# Altium PCB Mixer Placed.PCBDOC
Units mil, origin at the board's own origin, x right, y up, seen from the top; angles counter-clockwise.
Board outline 8000 x 4000 mil, 2 copper layers (Top Layer, Bottom Layer); 97 components, 56 nets, 281 pads, 0 vias.
Unrouted connection lines stored in the file: 188.
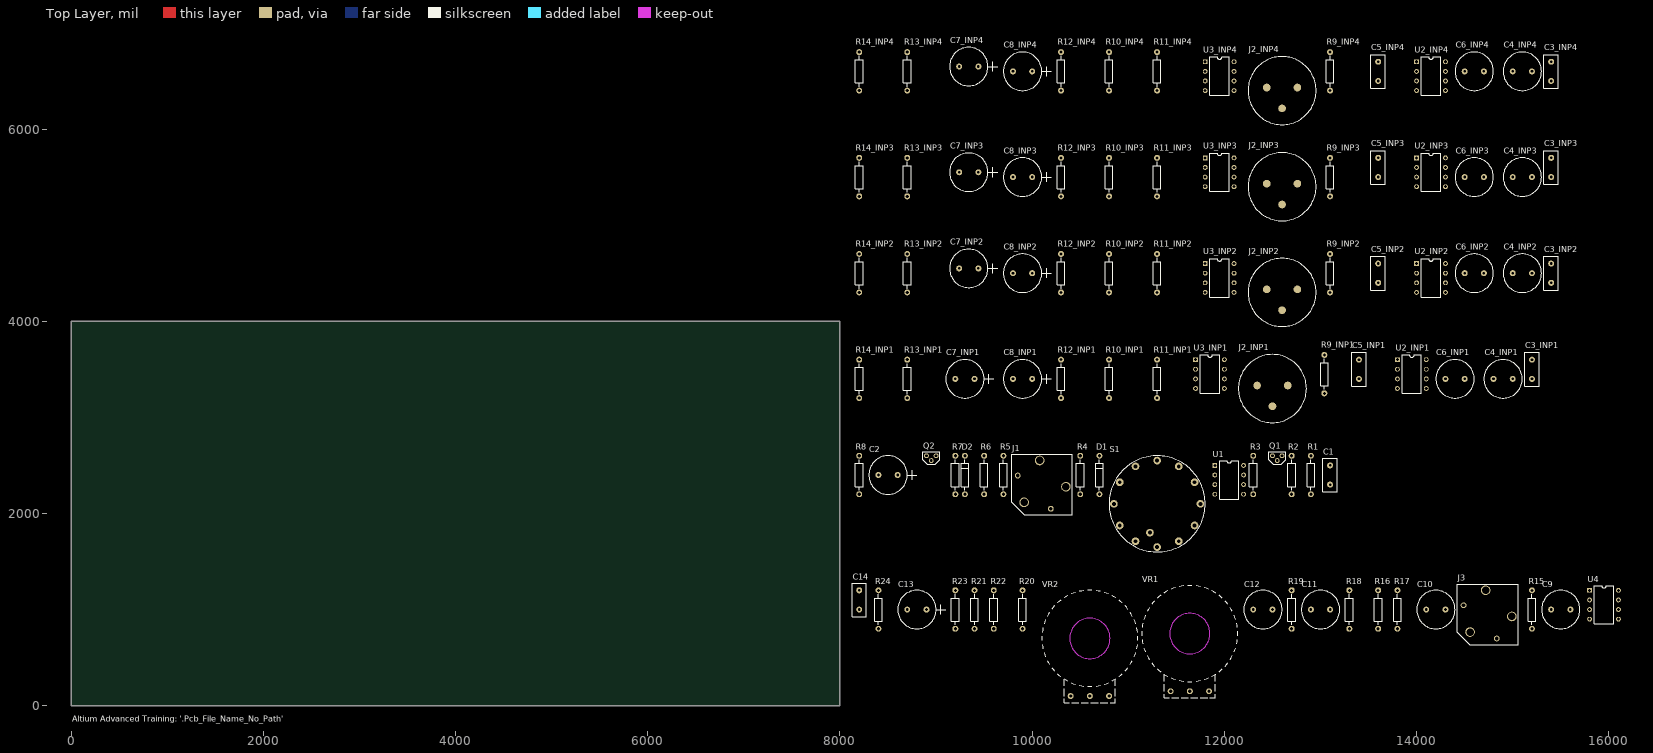
[diagram p0: Top Layer view]
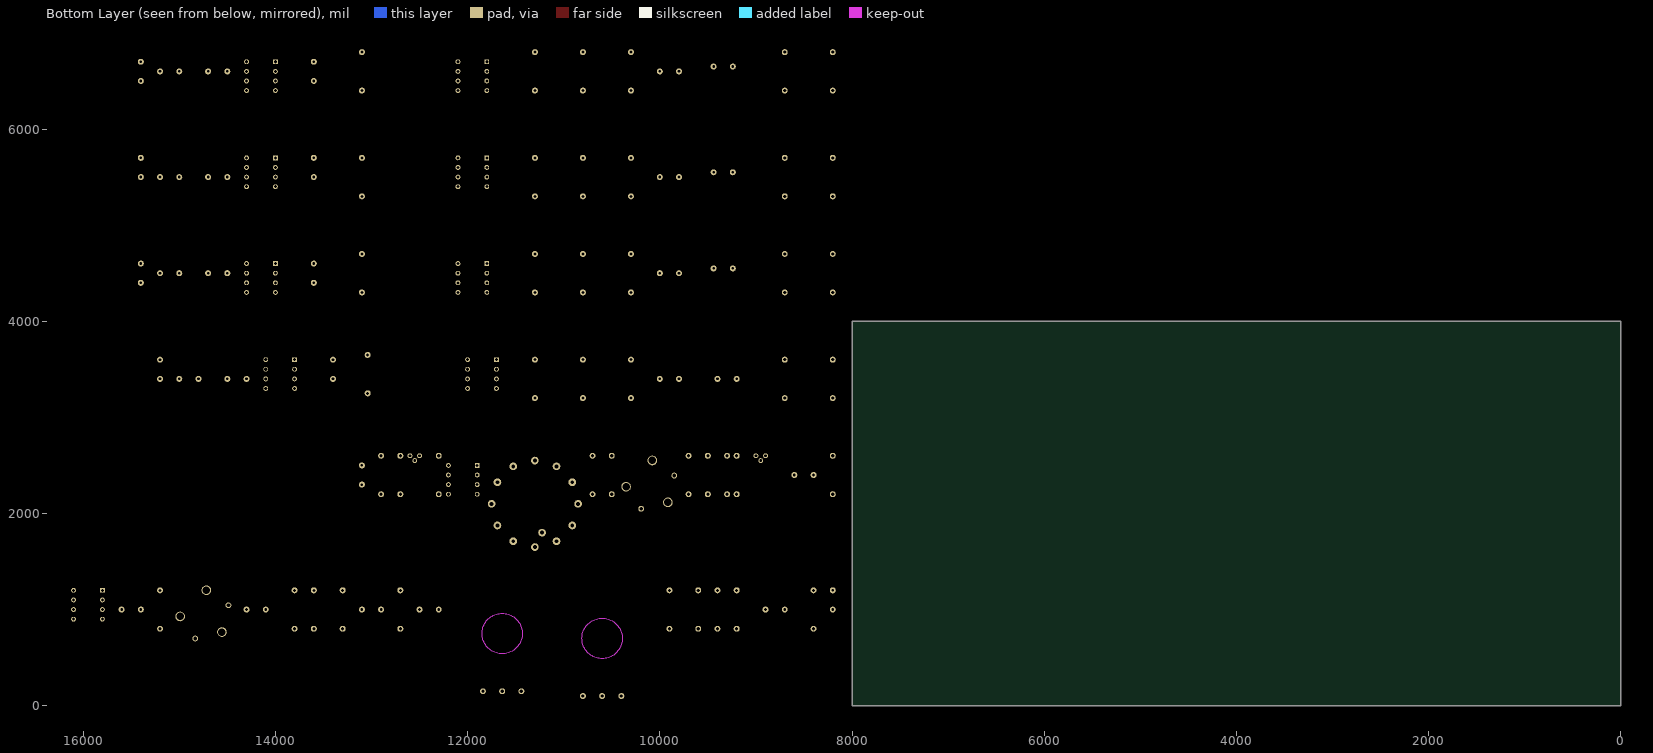
[diagram p1: Bottom Layer view, seen from below]

## Layer stack, top to bottom
Top Solder: solder mask 0.4, Solder Resist, Dk 3.5
Top Layer: signal copper 1.4
Dielectric 1: dielectric 12.6, FR-4, Dk 4.8
Bottom Layer: signal copper 1.4
Bottom Solder: solder mask 0.4, Solder Resist, Dk 3.5

## Board outline
0,0 8000,0 8000,3000 8000,4000 0,4000 0,0

## Design rules (kind name [scope] priority, off if disabled: settings)
Clearance [All] p1: gap=20 ignorepadtopadclearanceinfootprint=FALSE except(0: Arc-Hole Track-Hole SMDPad-Hole THPad-Hole Via-Hole Fill-Hole Poly-Hole Region-Hole Text-Hole)
PolygonConnect [All] p1: connectstyle=Relief reliefconductorwidth=10 reliefentries=4 polygonreliefangle="90 Angle" airgapwidth=10
RoomDefinition INP4 [InComponentClass('INP4')] p1: confinementstyle=ConfineIn formatcopy=TRUE lockcomponents=FALSE outline 8100,6000 15800,6000 15800,7000 8100,7000
RoomDefinition INP3 [InComponentClass('INP3')] p2: confinementstyle=ConfineIn formatcopy=TRUE lockcomponents=FALSE outline 8100,5000 15800,5000 15800,5900 8100,5900
RoomDefinition INP2 [InComponentClass('INP2')] p3: confinementstyle=ConfineIn formatcopy=TRUE lockcomponents=FALSE outline 8100,3900 15800,3900 15800,4900 8100,4900
RoomDefinition INP1 [InComponentClass('INP1')] p4: confinementstyle=ConfineIn formatcopy=TRUE lockcomponents=FALSE outline 8100,2900 15600,2900 15600,3800 8100,3800
RoomDefinition HP [InComponentClass('HP')] p5: confinementstyle=ConfineIn formatcopy=TRUE lockcomponents=FALSE outline 8100,1500 13200,1500 13200,2800 8100,2800
RoomDefinition AUX [InComponentClass('AUX')] p6: confinementstyle=ConfineIn formatcopy=TRUE lockcomponents=FALSE outline 8100,0 16200,0 16200,1400 8100,1400
RoutingVias [All] p1: holewidth=28 width=50 viastyle="Through Hole" minholewidth=28 minwidth=50 maxholewidth=28 maxwidth=50
SilkToBoardRegionClearance [All] p1 off:
SilkToSilkClearance [All] p1 off: silktosilkclearance=50
SilkToSolderMaskClearance [IsPad] p1: minsilkscreentomaskgap=100 clearancetoexposedcopper=TRUE
SolderMaskExpansion [All] p1: expansion=4 istentingtop=FALSE
Width [All] p1: maxlimit=30 minlimit=10 preferedwidth=20
27 further rules are at their usual default settings.

## Classes and differential pairs
channel class "Input channel": INP1 INP2 INP3 INP4
component class INP4: C3_INP4 C4_INP4 C5_INP4 C6_INP4 C7_INP4 C8_INP4 J2_INP4 R9_INP4 R10_INP4 R11_INP4 R12_INP4 R13_INP4 R14_INP4 U2_INP4 U3_INP4
component class INP3: C3_INP3 C4_INP3 C5_INP3 C6_INP3 C7_INP3 C8_INP3 J2_INP3 R9_INP3 R10_INP3 R11_INP3 R12_INP3 R13_INP3 R14_INP3 U2_INP3 U3_INP3
component class INP2: C3_INP2 C4_INP2 C5_INP2 C6_INP2 C7_INP2 C8_INP2 J2_INP2 R9_INP2 R10_INP2 R11_INP2 R12_INP2 R13_INP2 R14_INP2 U2_INP2 U3_INP2
component class INP1: C3_INP1 C4_INP1 C5_INP1 C6_INP1 C7_INP1 C8_INP1 J2_INP1 R9_INP1 R10_INP1 R11_INP1 R12_INP1 R13_INP1 R14_INP1 U2_INP1 U3_INP1
net class MB[1..2]: MB1 MB2
net class HEADPHONE[1..4]: HEADPHONE1 HEADPHONE2 HEADPHONE3 HEADPHONE4
component class HP: C1 C2 D1 D2 J1 Q1 Q2 R1 R2 R3 R4 R5 R6 R7 R8 S1 U1
component class AUX: C9 C10 C11 C12 C13 C14 J3 R15 R16 R17 R18 R19 R20 R21 R22 R23 R24 U4 VR1 VR2

## Components (designator, comment, footprint, x,y, rotation, side; value= is the part's Value field where it differs from the comment)
C1 "22pF" RAD0.2 13100,2300 r90 top
C2 "10uF" RB.2/.4 8600,2400 r0 top
C3_INP1 "10pF" RAD0.2 15200,3400 r90 top (schematic designator C3)
C3_INP2 "10pF" RAD0.2 15400,4400 r90 top (schematic designator C3)
C3_INP3 "10pF" RAD0.2 15400,5500 r90 top (schematic designator C3)
C3_INP4 "10pF" RAD0.2 15400,6500 r90 top (schematic designator C3)
C4_INP1 "6.8uF" RB.2/.4-NP 15000,3400 r0 top (schematic designator C4)
C4_INP2 "6.8uF" RB.2/.4-NP 15200,4500 r0 top (schematic designator C4)
C4_INP3 "6.8uF" RB.2/.4-NP 15200,5500 r0 top (schematic designator C4)
C4_INP4 "6.8uF" RB.2/.4-NP 15200,6600 r0 top (schematic designator C4)
C5_INP1 "270pF" RAD0.2 13400,3400 r90 top (schematic designator C5)
C5_INP2 "270pF" RAD0.2 13600,4400 r90 top (schematic designator C5)
C5_INP3 "270pF" RAD0.2 13600,5500 r90 top (schematic designator C5)
C5_INP4 "270pF" RAD0.2 13600,6500 r90 top (schematic designator C5)
C6_INP1 "2.2uF" RB.2/.4-NP 14500,3400 r0 top (schematic designator C6)
C6_INP2 "2.2uF" RB.2/.4-NP 14700,4500 r0 top (schematic designator C6)
C6_INP3 "2.2uF" RB.2/.4-NP 14700,5500 r0 top (schematic designator C6)
C6_INP4 "2.2uF" RB.2/.4-NP 14700,6600 r0 top (schematic designator C6)
C7_INP1 "10uF" RB.2/.4 9400,3400 r0 top (schematic designator C7)
C7_INP2 "10uF" RB.2/.4 9440,4550 r0 top (schematic designator C7)
C7_INP3 "10uF" RB.2/.4 9440,5550 r0 top (schematic designator C7)
C7_INP4 "10uF" RB.2/.4 9440,6650 r0 top (schematic designator C7)
C8_INP1 "10uF" RB.2/.4 10000,3400 r0 top (schematic designator C8)
C8_INP2 "10uF" RB.2/.4 10000,4500 r0 top (schematic designator C8)
C8_INP3 "10uF" RB.2/.4 10000,5500 r0 top (schematic designator C8)
C8_INP4 "10uF" RB.2/.4 10000,6600 r0 top (schematic designator C8)
C9 "1uF" RB.2/.4-NP 15600,1000 r0 top
C10 "2.2uF" RB.2/.4-NP 14300,1000 r0 top
C11 "1uF" RB.2/.4-NP 13100,1000 r0 top
C12 "2.2uF" RB.2/.4-NP 12500,1000 r0 top
C13 "10uF" RB.2/.4 8900,1000 r0 top
C14 "270pF" RAD0.2 8200,1000 r90 top
D1 "1N914" DIODE0.4 10700,2200 r90 top
D2 "1N914" DIODE0.4 9300,2200 r90 top
J1 "Headphone" JACK-6.25MM 10100,2300 r0 top
J2_INP1 "XLR" XLR-FEMALE 12500,3300 r0 top (schematic designator J2)
J2_INP2 "XLR" XLR-FEMALE 12600,4300 r0 top (schematic designator J2)
J2_INP3 "XLR" XLR-FEMALE 12600,5400 r0 top (schematic designator J2)
J2_INP4 "XLR" XLR-FEMALE 12600,6400 r0 top (schematic designator J2)
J3 "Auxilary In" JACK-6.25MM 14740,950 r0 top
Q1 "BC338-25" TO-92A 12500,2600 r0 top
Q2 "BC328-25" TO-92A 8900,2600 r0 top
R1 "68k" AXIAL0.4 12900,2200 r90 top
R2 "10k" AXIAL0.4 12700,2200 r90 top
R3 "33R" AXIAL0.4 12300,2200 r90 top
R4 "10k" AXIAL0.4 10500,2200 r90 top
R5 "68R" AXIAL0.4 9700,2200 r90 top
R6 "33R" AXIAL0.4 9500,2200 r90 top
R7 "22k" AXIAL0.4 9200,2200 r90 top
R8 "10k" AXIAL0.4 8200,2200 r90 top
R9_INP1 "15k" AXIAL0.4 13040,3250 r90 top (schematic designator R9)
R9_INP2 "15k" AXIAL0.4 13100,4300 r90 top (schematic designator R9)
R9_INP3 "15k" AXIAL0.4 13100,5300 r90 top (schematic designator R9)
R9_INP4 "15k" AXIAL0.4 13100,6400 r90 top (schematic designator R9)
R10_INP1 "10k" AXIAL0.4 10800,3200 r90 top (schematic designator R10)
R10_INP2 "10k" AXIAL0.4 10800,4300 r90 top (schematic designator R10)
R10_INP3 "10k" AXIAL0.4 10800,5300 r90 top (schematic designator R10)
R10_INP4 "10k" AXIAL0.4 10800,6400 r90 top (schematic designator R10)
R11_INP1 "10k" AXIAL0.4 11300,3200 r90 top (schematic designator R11)
R11_INP2 "10k" AXIAL0.4 11300,4300 r90 top (schematic designator R11)
R11_INP3 "10k" AXIAL0.4 11300,5300 r90 top (schematic designator R11)
R11_INP4 "10k" AXIAL0.4 11300,6400 r90 top (schematic designator R11)
R12_INP1 "15k" AXIAL0.4 10300,3200 r90 top (schematic designator R12)
R12_INP2 "15k" AXIAL0.4 10300,4300 r90 top (schematic designator R12)
R12_INP3 "15k" AXIAL0.4 10300,5300 r90 top (schematic designator R12)
R12_INP4 "15k" AXIAL0.4 10300,6400 r90 top (schematic designator R12)
R13_INP1 "10k" AXIAL0.4 8700,3200 r90 top (schematic designator R13)
R13_INP2 "10k" AXIAL0.4 8700,4300 r90 top (schematic designator R13)
R13_INP3 "10k" AXIAL0.4 8700,5300 r90 top (schematic designator R13)
R13_INP4 "10k" AXIAL0.4 8700,6400 r90 top (schematic designator R13)
R14_INP1 "10k" AXIAL0.4 8200,3200 r90 top (schematic designator R14)
R14_INP2 "10k" AXIAL0.4 8200,4300 r90 top (schematic designator R14)
R14_INP3 "10k" AXIAL0.4 8200,5300 r90 top (schematic designator R14)
R14_INP4 "10k" AXIAL0.4 8200,6400 r90 top (schematic designator R14)
R15 "10R" AXIAL0.4 15200,800 r90 top
R16 "15k" AXIAL0.4 13600,800 r90 top
R17 "15k" AXIAL0.4 13800,800 r90 top
R18 "22k" AXIAL0.4 13300,800 r90 top
R19 "10R" AXIAL0.4 12700,800 r90 top
R20 "22k" AXIAL0.4 9900,800 r90 top
R21 "15k" AXIAL0.4 9400,800 r90 top
R22 "15k" AXIAL0.4 9600,800 r90 top
R23 "6.8k" AXIAL0.4 9200,800 r90 top
R24 "2.2k" AXIAL0.4 8400,800 r90 top
S1 "SW-12WAY" SW-12WAY 11300,2100 r0 top
U1 "TL071" DIP8 11900,2500 r0 top
U2_INP1 "OP27C" DIP8 13800,3600 r0 top (schematic designator U2)
U2_INP2 "OP27C" DIP8 14000,4600 r0 top (schematic designator U2)
U2_INP3 "OP27C" DIP8 14000,5700 r0 top (schematic designator U2)
U2_INP4 "OP27C" DIP8 14000,6700 r0 top (schematic designator U2)
U3_INP1 "SSM2017P (8)" DIP8 11700,3600 r0 top (schematic designator U3)
U3_INP2 "SSM2017P (8)" DIP8 11800,4600 r0 top (schematic designator U3)
U3_INP3 "SSM2017P (8)" DIP8 11800,5700 r0 top (schematic designator U3)
U3_INP4 "SSM2017P (8)" DIP8 11800,6700 r0 top (schematic designator U3)
U4 "LM833M" DIP8 15800,1200 r0 top
VR1 "10k LOG" "POT - 24MM" 11640,750 r0 top
VR2 "10k LIN" "POT - 24MM" 10600,700 r0 top

## Footprints (in the part's own frame and the unit in brackets; to place one, negate y for a bottom-side part, rotate by r counter-clockwise, add the part's x,y. Pads: shape width x height; smd on the part's side, far side on the other; paste and mask are expansions set on the pad)
AXIAL0.4 [mil]
  round 62 hole 32: 1(0,0) 2(400,0)
  silkscreen extent 40,-40 360,40
DIODE0.4 [mil]
  round 62 hole 32: 1(0,0) 2(400,0)
  silkscreen extent 40,-40 360,40
DIP8 [mil]
  rect 50x50 hole 32: 1(0,0)
  round 50 hole 32: 2(0,-100) 3(0,-200) 4(0,-300) 5(300,-300) 6(300,-200) 7(300,-100) 8(300,0)
  silkscreen extent 50,-350 250,50
JACK-6.25MM [mil]
  round 60 hole 39: 0(-251,94) 0(94,-251)
  round 100 hole 78: 1(251,-22) 2(-22,251) 3(-184,-184)
  silkscreen extent -315,-315 315,315
"POT - 24MM" [mil]
  round 62 hole 35: 1(-200,-600) 2(0,-600) 3(200,-600)
  round 50 hole 236.22 unplated mask+4: MNT(0,0)
  Keep-Out Layer circle w10: c0,0 r210
  silkscreen extent -500,-670 500,500
RAD0.2 [mil]
  round 62 hole 28: 1(0,0) 2(200,0)
  silkscreen extent -75,-75 275,75
RB.2/.4 [mil]
  round 62 hole 28: 1(0,0) 2(-200,0)
  silkscreen extent -300,-200 200,200
RB.2/.4-NP [mil]
  round 62 hole 28: 1(0,0) 2(-200,0)
  silkscreen extent -300,-200 100,200
SW-12WAY [mil]
  round 80 hole 40: 1(225,389.71) 2(389.71,225) 3(450,0) 4(389.71,-225) 5(225,-389.71) 6(0,-450) 7(-225,-389.71) 8(-389.71,-225) 9(-450,0) 10(-389.71,225) 11(-225,389.71) 12(0,450) 13(-75,-300)
  silkscreen extent -500,-500 500,500
TO-92A [mil]
  round 50 hole 30: 1(0,0) 2(50,-50) 3(100,0)
  silkscreen extent -40,-90 140,40
XLR-FEMALE [mil]
  round 80 smd: 1(-159.45,31.5) 2(159.45,31.5) 3(0,-185.04)
  silkscreen extent -354,-354 354,354

## Part data
C1 C3_INP1 C3_INP2 C3_INP3 C3_INP4 C4_INP1 C4_INP2 C4_INP3 C4_INP4 C5_INP1 C5_INP2 C5_INP3 C5_INP4 C6_INP1 C6_INP2 C6_INP3 C6_INP4 C9 C10 C11 C12 C14: library part CAP, "Capacitor"
C2 C7_INP1 C7_INP2 C7_INP3 C7_INP4 C8_INP1 C8_INP2 C8_INP3 C8_INP4 C13: library part "CAPACITOR POL", "Bi-Polar Capacitor"
D1 D2: "Diode"
J1 J3: library part "PHONEJACK MONO"
J2_INP1 J2_INP2 J2_INP3 J2_INP4: "XLR connector, PCB mounted"
Q1: "NPN BJT"
Q2: "PNP BJT"
R1 R2 R3 R4 R5 R6 R7 R8 R9_INP1 R9_INP2 R9_INP3 R9_INP4 R10_INP1 R10_INP2 R10_INP3 R10_INP4 R11_INP1 R11_INP2 R11_INP3 R11_INP4 R12_INP1 R12_INP2 R12_INP3 R12_INP4 R13_INP1 R13_INP2 R13_INP3 R13_INP4 R14_INP1 R14_INP2 R14_INP3 R14_INP4 R15 R16 R17 R18 R19 R20 R21 R22 R23 R24: library part RES1, "Resistor"
U1: "Low-Noise  JFET-Input Operational Amplifiers"
U2_INP1 U2_INP2 U2_INP3 U2_INP4: "Low Noise, High Speed Precision Operational Amplifier"
U3_INP1 U3_INP2 U3_INP3 U3_INP4: "Self-Contained Audio Preamplifier"
U4: "Fast Settling Dual Operational Amplifier"
VR1 VR2: library part POT1, "Potentiometer"

## Nets (pads, with @x,y where several pads share a name; then routed paths per layer and width w, separated by ;. In a path a pad name is that pad's centre, name@x,y a point inside that pad or via, vN(x,y) a via of type N, cw(c..) or ccw(c..) an arc to the next point about the centre after c; other vN are vias at no path point)
+15V: C2.1 C7_INP1.1 C7_INP2.1 C7_INP3.1 C7_INP4.1 C8_INP1.1 C8_INP2.1 C8_INP3.1 C8_INP4.1 C13.1 Q1.1 R2.2 U1.7 U2_INP1.7 U2_INP2.7 U2_INP3.7 U2_INP4.7 U3_INP1.7 U3_INP2.7 U3_INP3.7 U3_INP4.7 U4.4
-15V: C2.2 C7_INP1.2 C7_INP2.2 C7_INP3.2 C7_INP4.2 C8_INP1.2 C8_INP2.2 C8_INP3.2 C8_INP4.2 C13.2 Q2.1 R8.1 U1.4 U2_INP1.4 U2_INP2.4 U2_INP3.4 U2_INP4.4 U3_INP1.4 U3_INP2.4 U3_INP3.4 U3_INP4.4 U4.8
GND: J1.3 J2_INP1.1 J2_INP2.1 J2_INP3.1 J2_INP4.1 J3.3 R7.1 R10_INP1.1 R10_INP2.1 R10_INP3.1 R10_INP4.1 R11_INP1.1 R11_INP2.1 R11_INP3.1 R11_INP4.1 R14_INP1.1 R14_INP2.1 R14_INP3.1 R14_INP4.1 R18.1 R20.1 R24.2 U2_INP1.3 U2_INP2.3 U2_INP3.3 U2_INP4.3 U3_INP1.5 U3_INP2.5 U3_INP3.5 U3_INP4.5 VR1.3 VR2.2
HEADPHONE1: R13_INP1.2 S1.8
HEADPHONE2: R13_INP2.2 S1.7
HEADPHONE3: R13_INP3.2 S1.6
HEADPHONE4: R13_INP4.2 S1.5
MB1: R9_INP1.2 R9_INP2.2 R9_INP3.2 R9_INP4.2 R17.2 S1.11
MB2: R12_INP1.2 R12_INP2.2 R12_INP3.2 R12_INP4.2 R22.2 S1.12
NetC1_1: C1.1 R1.1 R4.2 U1.2
NetC1_2: C1.2 R1.2 R3.1 R5.1 R6.2
NetC3_INP1_1: C3_INP1.1 C4_INP1.2 U2_INP1.2
NetC3_INP1_2: C3_INP1.2 C6_INP1.1 U2_INP1.6
NetC3_INP2_1: C3_INP2.1 C4_INP2.2 U2_INP2.2
NetC3_INP2_2: C3_INP2.2 C6_INP2.1 U2_INP2.6
NetC3_INP3_1: C3_INP3.1 C4_INP3.2 U2_INP3.2
NetC3_INP3_2: C3_INP3.2 C6_INP3.1 U2_INP3.6
NetC3_INP4_1: C3_INP4.1 C4_INP4.2 U2_INP4.2
NetC3_INP4_2: C3_INP4.2 C6_INP4.1 U2_INP4.6
NetC4_INP1_1: C4_INP1.1 U3_INP1.6
NetC4_INP2_1: C4_INP2.1 U3_INP2.6
NetC4_INP3_1: C4_INP3.1 U3_INP3.6
NetC4_INP4_1: C4_INP4.1 U3_INP4.6
NetC5_INP1_1: C5_INP1.1 J2_INP1.2 R10_INP1.2 U3_INP1.2
NetC5_INP1_2: C5_INP1.2 J2_INP1.3 R11_INP1.2 U3_INP1.3
NetC5_INP2_1: C5_INP2.1 J2_INP2.2 R10_INP2.2 U3_INP2.2
NetC5_INP2_2: C5_INP2.2 J2_INP2.3 R11_INP2.2 U3_INP2.3
NetC5_INP3_1: C5_INP3.1 J2_INP3.2 R10_INP3.2 U3_INP3.2
NetC5_INP3_2: C5_INP3.2 J2_INP3.3 R11_INP3.2 U3_INP3.3
NetC5_INP4_1: C5_INP4.1 J2_INP4.2 R10_INP4.2 U3_INP4.2
NetC5_INP4_2: C5_INP4.2 J2_INP4.3 R11_INP4.2 U3_INP4.3
NetC6_INP1_2: C6_INP1.2 R9_INP1.1 R12_INP1.1 R13_INP1.1 R14_INP1.2
NetC6_INP2_2: C6_INP2.2 R9_INP2.1 R12_INP2.1 R13_INP2.1 R14_INP2.2
NetC6_INP3_2: C6_INP3.2 R9_INP3.1 R12_INP3.1 R13_INP3.1 R14_INP3.2
NetC6_INP4_2: C6_INP4.2 R9_INP4.1 R12_INP4.1 R13_INP4.1 R14_INP4.2
NetC9_1: C9.1 J3.1
NetC9_2: C9.2 R15.1 R18.2
NetC10_1: C10.1 U4.1 U4.2
NetC10_2: C10.2 VR1.1
NetC11_1: C11.1 VR1.2
NetC11_2: C11.2 R19.1 R20.2
NetC12_1: C12.1 C14.2 R23.1 U4.7
NetC12_2: C12.2 R16.1 R21.1
NetC14_1: C14.1 R23.2 R24.1 U4.6
NetD1_1: D1.1 Q1.2 R2.1
NetD1_2: D1.2 D2.1 U1.6
NetD2_2: D2.2 Q2.2 R8.2
NetJ1_1: J1.1 R5.2
NetQ1_3: Q1.3 R3.2
NetQ2_3: Q2.3 R6.1
NetR4_1: R4.1 S1.13
NetR7_2: R7.2 U1.3
NetR15_2: R15.2 U4.3
NetR16_2: R16.2 R17.1 VR2.1
NetR19_2: R19.2 U4.5
NetR21_2: R21.2 R22.1 VR2.3
pads on no net: J1.0 J1.2 J3.0 J3.2 S1.1 S1.2 S1.3 S1.4 S1.9 S1.10 U1.1 U1.5 U1.8 U2_INP1.1 U2_INP1.5 U2_INP1.8 U2_INP2.1 U2_INP2.5 U2_INP2.8 U2_INP3.1 U2_INP3.5 U2_INP3.8 U2_INP4.1 U2_INP4.5 U2_INP4.8 U3_INP1.1 U3_INP1.8 U3_INP2.1 U3_INP2.8 U3_INP3.1 U3_INP3.8 U3_INP4.1 U3_INP4.8 VR1.MNT VR2.MNT

## Silkscreen, mask and mechanical layers (free items; w line width, h text height)
Top Overlay:
  text "Altium Advanced Training: '.Pcb_File_Name_No_Path'" at 10,-170.01 h60